# Altium PCB Decector.PcbDoc
Units mil, origin at the board's own origin, x right, y up, seen from the top; angles counter-clockwise.
Board outline 4080 x 2615 mil, 2 copper layers (Top Layer, Bottom Layer); 12 components, 9 nets, 48 pads, 0 vias.
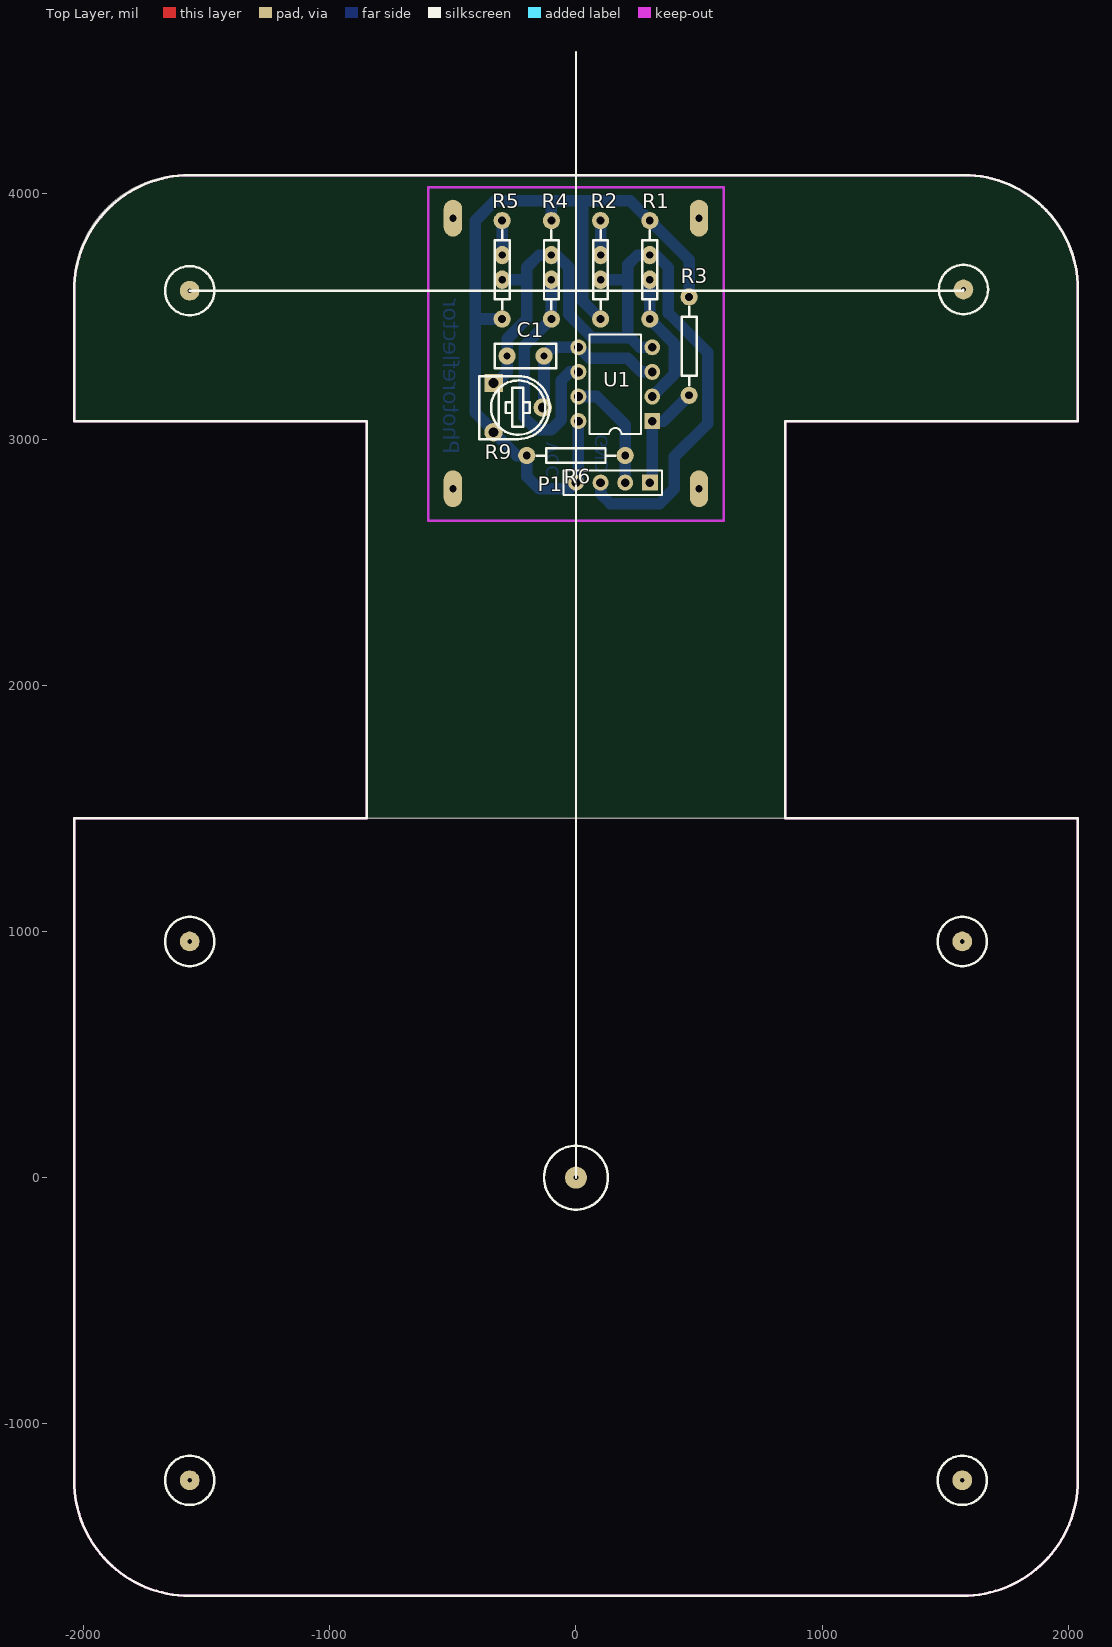
[diagram p0: Top Layer view]
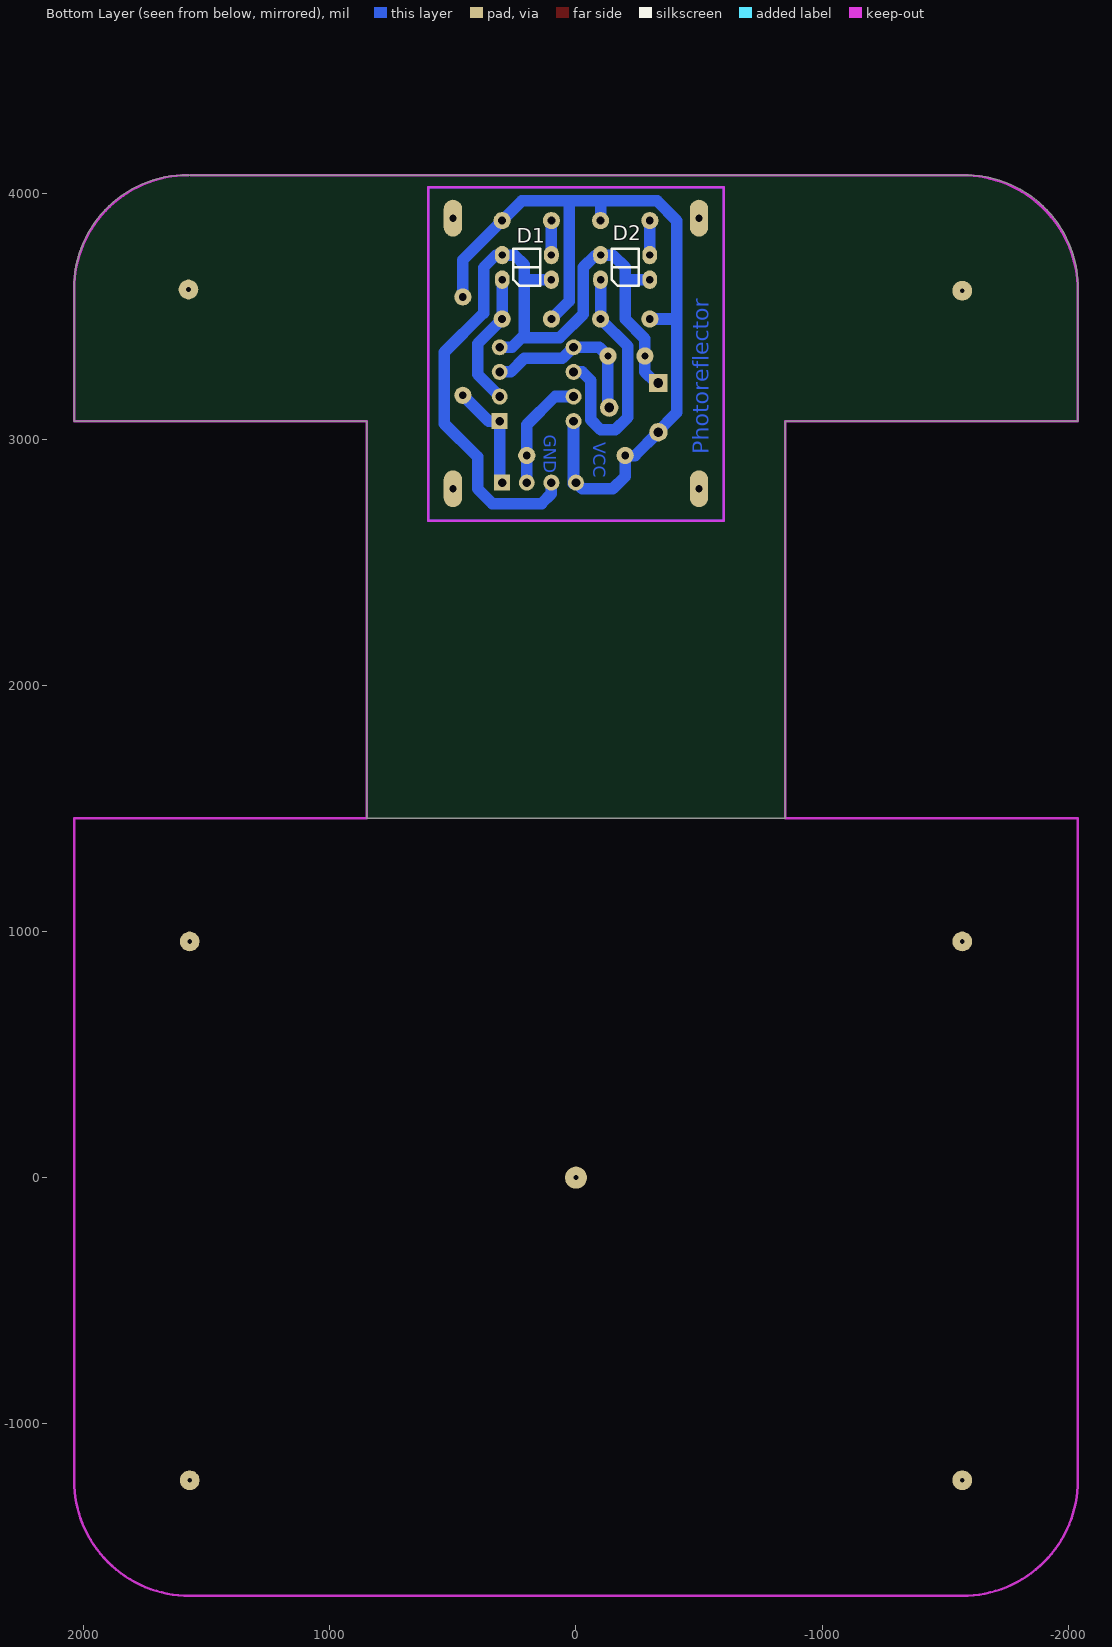
[diagram p1: Bottom Layer view, seen from below]

## Layer stack, top to bottom
Top Layer: signal copper 1.4
Dielectric: dielectric 12.6, FR-4, Dk 4.8
Bottom Layer: signal copper 1.4

## Board outline
-850,1460 -850,3075 -2040,3075 -2040,3620 cw(c-1585,3620) -1585,4075 1585,4075 cw(c1585,3620) 2040,3620 2040,3075 850,3075 850,1460

## Design rules (kind name [scope] priority, off if disabled: settings)
Clearance [All] p1: gap=10
ComponentClearance [All] p1: gap=10 collisioncheckmode=3 verticalgap=10
PolygonConnect [All] p1: connectstyle=Relief reliefconductorwidth=10 reliefentries=4 polygonreliefangle="90 Angle"
RoutingVias [All] p1: holewidth=28 width=50 viastyle="Through Hole" minholewidth=28 minwidth=50 maxholewidth=28 maxwidth=50
SolderMaskExpansion [All] p1: expansion=4
TestPointUsage [All] p1: valid=0 allowmultiple=FALSE
Testpoint [All] p1: side=15 testpointundercomponent=TRUE minsize=40 maxsize=100 preferedsize=60 minholesize=0 maxholesize=40 preferedholesize=32 testpointgrid=1 style=1023 order=0-112345678
Width [All] p1: maxlimit=75 minlimit=10 preferedwidth=10 toplayer_maxwidth=10 bottomlayer_prefwidth=47 minimp=50.000000 maximp=50.000000 favimp=50.000000
17 further rules are at their usual default settings.

## Components (designator, comment, footprint, x,y, rotation, side; value= is the part's Value field where it differs from the comment)
C1 "CAP" CAP_104 -130,3340 r180 top
D1 "SPI-315" photodevice 300,3650 r180 bottom
D2 "SPI-315" photodevice -100,3650 r180 bottom
P1 "Header 4" HDR1X4 300,2825 r180 top
R1 "200" AXIAL0.4 300,3490 r90 top
R2 "51K" AXIAL0.4 100,3890 r270 top
R3 "5.1K" AXIAL0.4 460,3180 r90 top
R4 "200" AXIAL0.4 -100,3490 r90 top
R5 "51K" AXIAL0.4 -300,3890 r270 top
R6 "5.1K" AXIAL0.4 200,2935 r180 top
R9 "RP1" RP_05 -335,3230 r270 top
U1 "LM393N" 626-05 160,3225 r90 top

## Footprints (in the part's own frame and the unit in brackets; to place one, negate y for a bottom-side part, rotate by r counter-clockwise, add the part's x,y. Pads: shape width x height; smd on the part's side, far side on the other; paste and mask are expansions set on the pad)
626-05 [mil] "DIP; 8 Leads; Row Spacing 7.62 mm; Pitch 2.54 mm"
  rect 65x65 hole 35.43 unplated: 1(-150,-150)
  round 65 hole 35.43 unplated: 2(-50,-150) 3(50,-150) 4(150,-150) 5(150,150) 6(50,150) 7(-50,150) 8(-150,150)
  silkscreen extent -203,-104 203,104
AXIAL0.4 [mil]
  round 70 hole 32: 1(0,0) 2(400,0)
  silkscreen extent 40,-30 360,30
CAP_104 [mil]
  round 70 hole 27.56: 1(0,0) 2(150,0)
  silkscreen extent -50,-50 200,50
HDR1X4 [mil] "Connector; Header; 4 Position"
  rect 65x65 hole 35.43 unplated: 1(0,0)
  round 65 hole 35.43 unplated: 2(100,0) 3(200,0) 4(300,0)
  silkscreen extent -50,-50 350,50
photodevice [mil]
  oval 60x75 hole 30: 1(0,0) 2(200,0) 3(200,100) 4(0,100)
  silkscreen extent 45,-25 155,125
RP_05 [mm]
  rect 1.905x1.905 hole 1: 1(0,0)
  round 1.905 hole 1: 2(2.54,5.08) 3(5.08,0)
  silkscreen extent -0.71,-1.5 5.79,5.79

## Part data
D1 D2: library part PHOTOISO3
P1: "Header, 4-Pin"
R1 R2 R3 R4 R5 R6: library part R1
R9: "Potentiometer"
U1: "Dual Comparator"

## Free pads (board coordinates)
  round 80 hole 20: 0(-1570,-1230) 0(-1570,960) 0(-1570,3605) 0(1570,-1230) 0(1570,960) 0(1575,3610)
  oval 75x150 hole 30: 0(-500,3900) 1(500,3900) 2(500,2800) 3(-500,2800)
  round 90 hole 20: 0(0,0)

## Nets (pads, with @x,y where several pads share a name; then routed paths per layer and width w, separated by ;. In a path a pad name is that pad's centre, name@x,y a point inside that pad or via, vN(x,y) a via of type N, cw(c..) or ccw(c..) an arc to the next point about the centre after c; other vN are vias at no path point)
GND: C1.2 D1.2 D1.4 D2.2 D2.4 P1.3 R9.1 U1.4 | length 3394.6
  Bottom Layer w47: R9.1@-325,3230 -280,3275 -280,3410 -200,3490 -200,3700 -150,3750 D2.4 ; D2.2 -200,3650 ; D2.4@-80,3750 -30,3700 -30,3510 65.39,3414.61 220.39,3414.61 ; P1.3 100,2780 140,2740 340,2740 400,2800 400,2930 534.83,3064.83 534.83,3355.17 375.74,3514.26 375.74,3699.26 D1.4@325,3750 ; D1.2 210,3650 ; D1.4 250,3750 210,3710 210,3425 260,3375 U1.4
NetD1_1: D1.1 R1.1 U1.2 | length 553.7
  Bottom Layer w47: D1.1 R1.1 400,3390 400,3265 U1.2
NetD1_3: D1.3 R2.1 | length 130
  Bottom Layer w47: D1.3@100,3760 R2.1
NetD2_1: D2.1 R4.1 U1.6 | length 1037.3
  Bottom Layer w47: D2.1 R4.1 -210,3380 -210,3090 -160,3040 -100,3040 -60,3080 -60,3240 -25,3275 U1.6
NetD2_3: D2.3 R5.1 | length 150
  Bottom Layer w47: D2.3@-300,3740 R5.1
OUT1: P1.1 R3.1 U1.1 | length 447.6
  Bottom Layer w47: P1.1 310,2835 U1.1 355,3075 R3.1
OUT2: P1.2 R6.1 U1.7 | length 472.6
  Bottom Layer w47: U1.7 85,3175 200,3060 P1.2
VCC: P1.4 R1.2 R2.2 R3.2 R4.2 R5.2 R6.2 R9.3 U1.8 | length 3480.9
  Bottom Layer w47: -390,3490 R5.2 ; R9.3 -240,2935 R6.2 -200,2850 -150,2800 -25,2800 10,2835 U1.8 ; R9.3@-325,3025 -410,3110 -410,3890 -330,3970 220,3970 460,3730 R3.2 ; R4.2 -100,3970 ; P1.4@8.5,2821.5 P1.4@10,2820 ; 30,3970 27,3967 27,3563 R2.2
VS: C1.1 R9.2 U1.3 U1.5 | length 708
  Bottom Layer w47: C1.1@-130,3335 -130,3130 R9.2@-125,3125 ; C1.1 -95,3375 U1.5 55,3330 210,3330 265,3275 U1.3
copper on no net: | length 5110
  Bottom Layer w10: -600,2670 600,2670 600,4025 -600,4025 -600,2670

## Keep-outs
Keep-Out Layer:
  lines w10: 1565,4075 -1570,4075 ccw(c-1570,3605) -2040,3605 -2040,3075 -850,3075 -850,2945 -850,1460 -2040,1460 -2040,-1230 ccw(c-1570,-1230) -1570,-1700 1570,-1700 ccw(c1570,-1230) 2040,-1230 2040,1460 1775,1460 850,1460 850,3075 1375,3075 2040,3075 2040,3610 ; 2040,3620 2040,3625 ; 2040,3610 ccw(c1575,3610) 1575,4075 cw(c1575,3610) 2040,3610 ; -600,2670 -600,4025 600,4025 600,2670 -600,2670

## Other copper
Bottom Layer:
  text "GND" at 130,3020 h50 r90
  text "VCC" at -70,2990 h50 r90
  text "Photoreflector" at -540,2940 h65 r270

## Silkscreen, mask and mechanical layers (free items; w line width, h text height)
Top Overlay:
  circle w10: c0,0 r130
  circle w10: c-1570,-1230 r100
  circle w10: c1570,-1230 r100
  circle w10: c1575,3610 r100
  circle w10: c-1570,3605 r100
  circle w10: c1570,960 r100
  circle w10: c-1570,960 r100
  lines w10: -1570,3605 1575,3605 1575,3610 ; 0,0 0,4575 ; 2005,3075 2040,3075 ; 2040,3075 1240,3075 850,3075 850,1460 2040,1460 2040,-1230 cw(c1570,-1230) 1570,-1700 -1570,-1700 cw(c-1570,-1230) -2040,-1230 -2040,1460 -850,1460 -850,1575 -850,3075 -1140,3075 -2040,3075 -2040,3605 cw(c-1570,3605) -1570,4075 1575,4075 cw(c1575,3610) 2040,3610 2040,3075